# EAGLE board modulo_RJ11_6 (EAGLE 6.5.0)
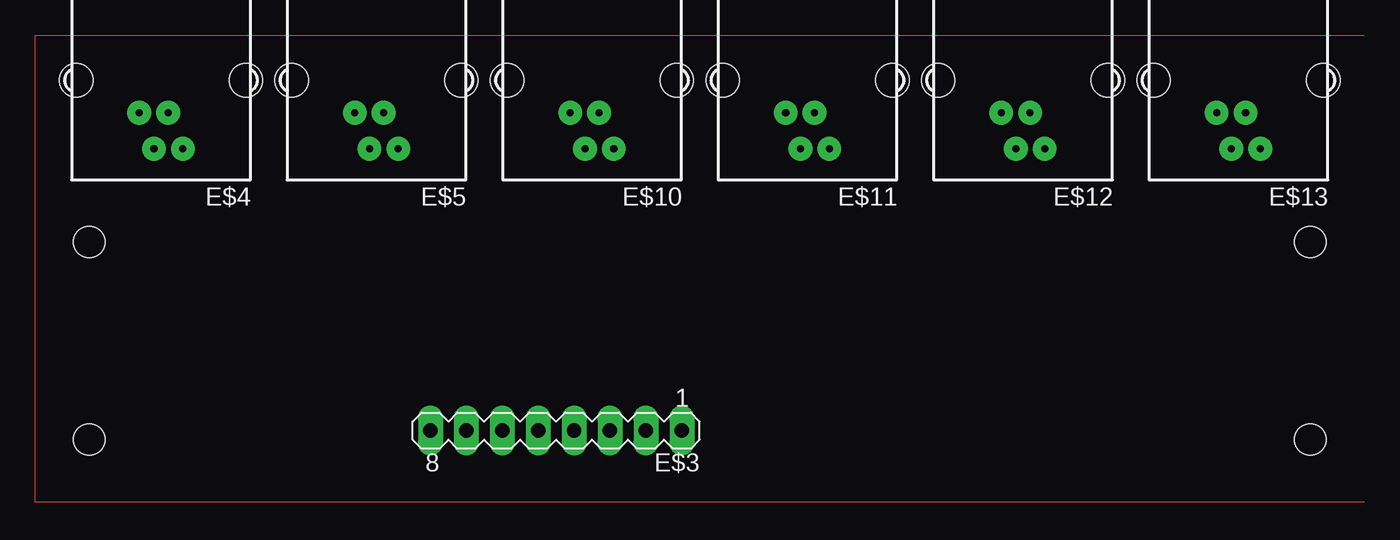
[diagram p0: board, top side]
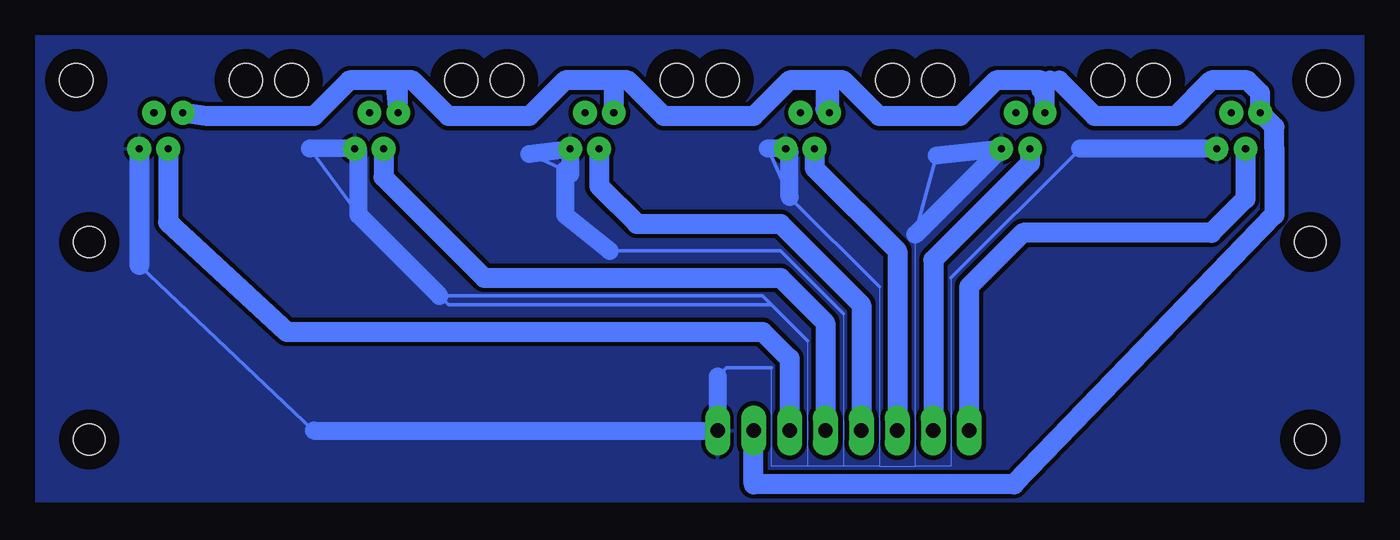
[diagram p1: board, bottom side, seen from below]

No outline drawn. Coordinates in mm, seen from the top.
Copper layers (1*16): Top 0.035mm / dielectric 1.5mm / Bottom 0.035mm
Design rules "default *": minimum track width 10mil, minimum drill 24mil, track to track 8mil, track to pad 8mil, pad to pad 8mil, via to via 8mil, smd to smd 8mil, copper to edge 40mil, drill to drill 8mil, minimum pad ring 15mil, minimum via ring 15mil, stop-mask expansion 4mil, vias tented up to drill 0mil, thermal gap 10mil
Holes 2.2 mm at 3.81,18.41 3.81,4.45 90.17,4.45 90.17,18.41

## Footprints (pad centres in the part's own frame; a part is rotated, then mirrored left to right if it is on the bottom)
MA08-1 = drill 1.016 long: 1 -8.89,0; 2 -6.35,0; 3 -3.81,0; 4 -1.27,0; 5 1.27,0; 6 3.81,0; 7 6.35,0; 8 8.89,0
YH-55-10 = drill 0.5 pad 1.676: 2 -1.54,4.84; 3 -0.5,2.3; 4 0.5,4.84; 5 1.54,2.3 | hole 2.36: -6,0; 6,0

## Placement (x,y rotation side)
E$3  [MA08-1]  36.83,5.08 180 top
E$4  [YH-55-10]  8.89,29.84 180 top
E$5  [YH-55-10]  24.13,29.84 180 top
E$10  [YH-55-10]  39.37,29.84 180 top
E$11  [YH-55-10]  54.61,29.84 180 top
E$12  [YH-55-10]  69.85,29.84 180 top
E$13  [YH-55-10]  85.09,29.84 180 top

## Library data of the parts
E$3 = con-lstb
E$4 E$5 E$10-E$13 = ARDUINO2

## Nets
GND: E$3.1 E$4.2 E$5.2 E$10.2 E$11.2 E$12.2 E$13.2
S$1: E$3.3
S$2: E$3.4
S$3: E$3.5
S$4: E$3.6
S$5: E$3.7
S$6: E$3.8
S$15: E$3.2

## Tracks (layer width: path | path; a pad name or v marks a point on that pad's centre or on a via)
GND
  Bottom 0: 29.21,15.88 29.21,2.54 31.75,2.54 | 31.75,2.54 31.75,19.05 | 34.29,15.24 34.29,2.54 | 34.29,2.54 31.75,2.54 | 34.29,2.54 36.83,2.54 | 36.83,13.34 36.83,2.54 | 36.83,2.54 39.37,2.54 | 39.37,11.43 39.37,2.54 | 39.37,2.54 41.91,2.54 41.91,9.53
  Bottom 0.254: 20.08,25 29.21,15.88 | 30.24,24.52 31.75,19.05 31.75,18.93 | 34.29,15.24 40.64,21.59 42.18,25.04 | 59.05,24.64 56.52,23.5 56.15,23.23 | 53.34,17.78 41.27,17.78 36.83,13.34 | 39.37,11.43 41.91,13.97 | 41.91,13.97 64.77,13.97 65.41,14.61 42.55,14.61 41.91,13.97 | 71.12,24.73 E$12.2 | 74.56,25.04 71.12,20.32 | 41.91,9.53 45.09,9.53 45.72,8.89 | 45.72,5.71 46.35,5.08 | 86.63,16.78 74.3,5.08
  Bottom 1.27: E$4.2 20.08,25 | 31.75,18.93 E$5.2 30.24,24.52 | 40.64,21.59 40.64,24.73 E$10.2 42.18,25.04 | 59.05,24.64 E$11.2 56.15,23.23 | 56.52,23.5 56.52,20.32 53.34,17.78 | 65.41,14.61 71.12,20.32 71.12,24.73 | E$12.2 74.56,25.04 | 45.72,8.89 45.72,5.71 | E$3.1 46.35,5.08 74.3,5.08
  Bottom 1.422: E$13.2 86.63,16.78
  pour Bottom (isolate 0.305): 0,0 93.98,0 93.98,33.02 0,33.02
S$1
  Bottom 1.422: 84.59,25 84.59,19.82 76.2,12.06 42.55,12.06 40.64,10.16 E$3.3
S$2
  Bottom 1.422: 69.35,25 69.35,23 62.23,15.88 41.27,15.88 38.1,12.7 E$3.4
S$3
  Bottom 1.422: 54.11,25 54.11,22.36 51.44,19.68 41.27,19.68 35.56,13.97 E$3.5
S$4
  Bottom 1.422: 38.87,25 38.87,23.63 33.02,17.78 E$3.6
S$5
  Bottom 1.422: 23.63,25 23.63,24 30.48,17.14 E$3.7
S$6
  Bottom 1.422: 8.39,25 8.39,21.45 10.79,19.05 24.13,19.05 27.94,15.24 E$3.8
S$8
  Bottom 0.813: 22.86,29.21 22.86,27.82 22.59,27.55 | 22.59,29.57 22.86,29.84 | 38.1,27.82 37.83,27.55 | 37.83,29.57 38.1,29.84 | 53.07,27.55 53.34,27.82 53.34,29.84 53.07,29.57 | 68.31,29.57 68.58,29.84
  Bottom 1.016: 21.59,29.84 22.23,29.84
  Bottom 1.422: 6.35,25 6.35,26.55 7.35,27.55 7.35,28.94 8.26,29.84 10.79,29.84 13.34,27.3 19.05,27.3 21.59,29.84 | 22.23,29.84 22.86,29.21 | 22.59,27.55 22.59,29.57 | 22.86,29.84 26.04,29.84 28.57,27.3 34.29,27.3 36.83,29.84 38.1,29.84 | 38.1,29.84 38.1,27.82 | 37.83,27.55 37.83,29.57 | 38.1,29.84 40.64,29.84 43.18,27.3 49.53,27.3 52.07,29.84 53.34,29.84 56.52,29.84 59.05,27.3 64.77,27.3 67.31,29.84 68.55,29.84 68.31,27.55 68.31,29.57 | 53.07,27.55 53.07,29.57 | 68.58,29.84 71.75,29.84 74.3,27.3 81.89,27.3 83.55,27.55
S$12
  Top 0: 93.98,33.02 0,33.02 0,0 93.98,0
S$15
  Bottom 1.422: 6.35,24.77 6.35,20.32 24.77,1.27 43.18,1.27 E$3.2